# EAGLE board AVRI2CIO_V0_2_LEVEL0 (EAGLE 6.5.0)
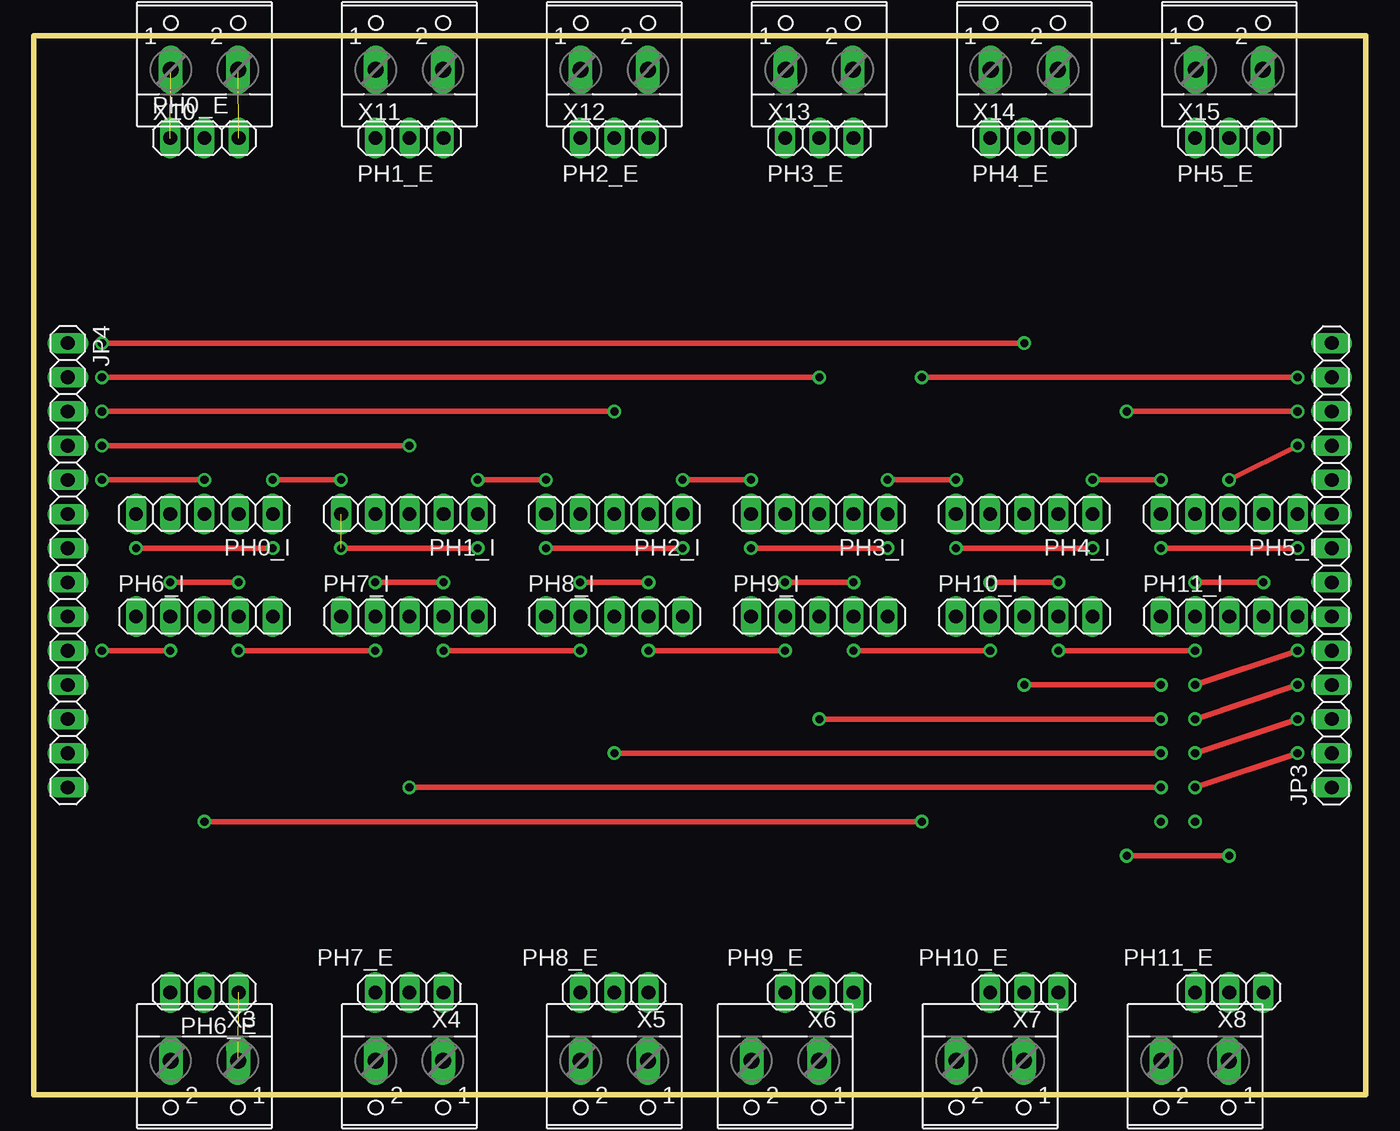
[diagram p0: board, top side]
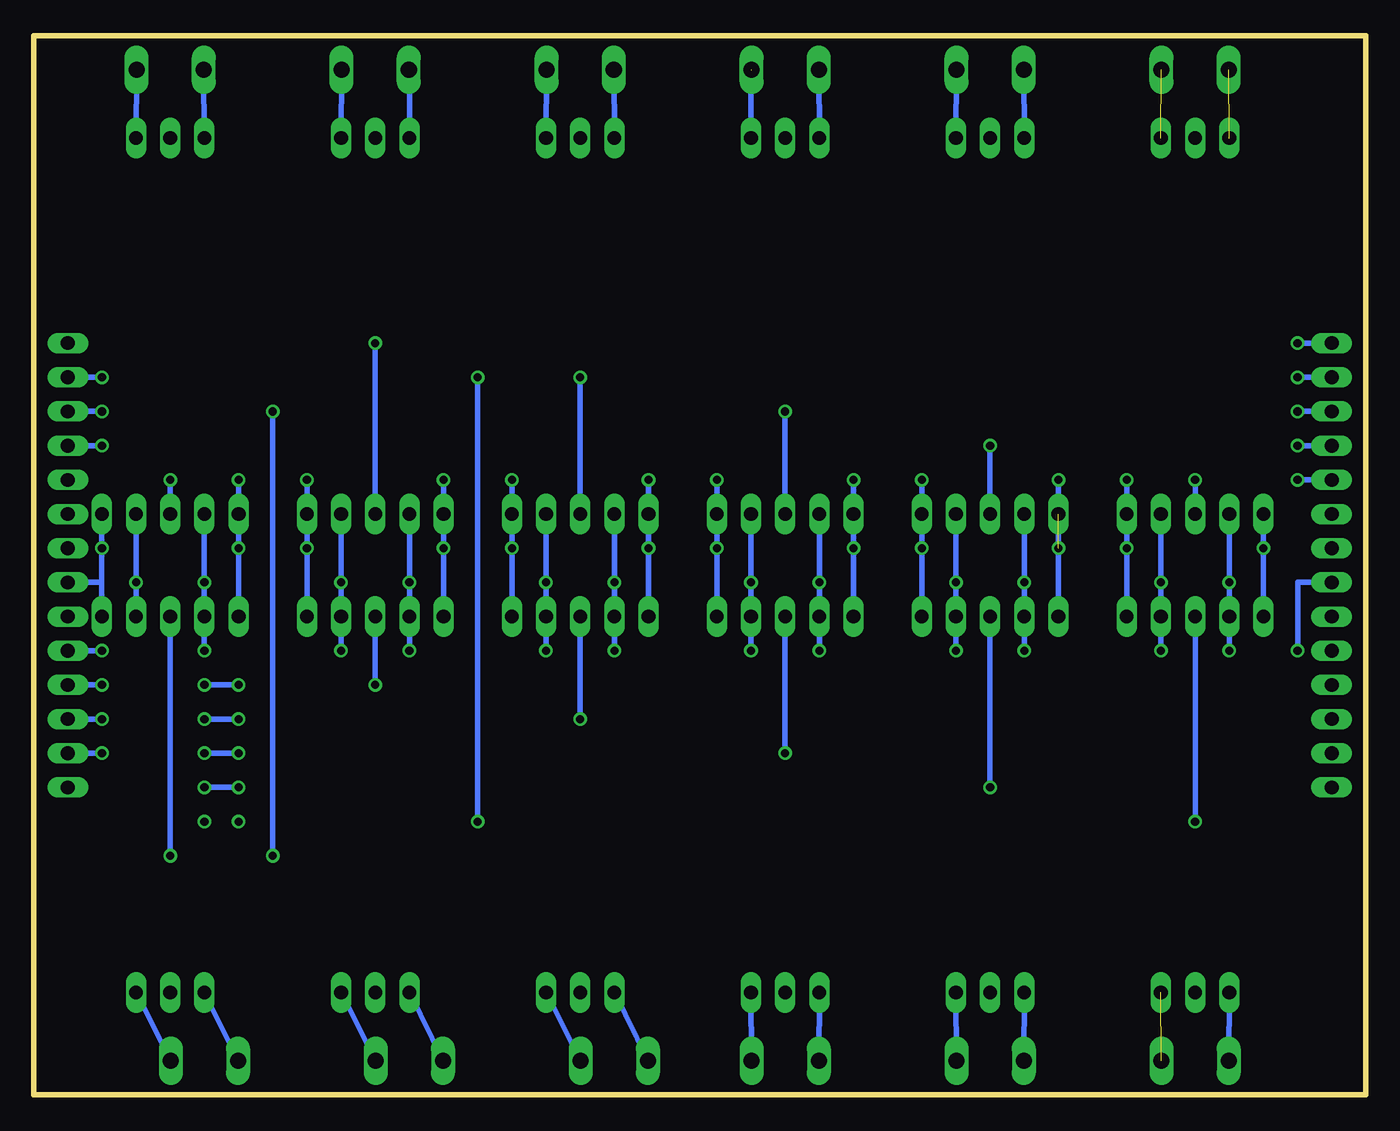
[diagram p1: board, bottom side, seen from below]

Size 99.06 x 78.74 mm. Coordinates in mm from the lower left corner, seen from the top.
Outline: 0,0 99.06,0 99.06,78.74 0,78.74 0,0
Copper layers (1*16): Top 0.035mm / dielectric 1.5mm / Bottom 0.035mm
Design rules "default": minimum track width 10mil, minimum drill 24mil, track to track 8mil, track to pad 8mil, pad to pad 8mil, via to via 8mil, smd to smd 8mil, copper to edge 40mil, drill to drill 8mil, minimum pad ring 10mil, minimum via ring 8mil, stop-mask expansion 4mil, vias tented up to drill 0mil, thermal gap 10mil

## Footprints (pad centres in the part's own frame; a part is rotated, then mirrored left to right if it is on the bottom)
1X14 = drill 1.016 long: 1 -16.51,0; 2 -13.97,0; 3 -11.43,0; 4 -8.89,0; 5 -6.35,0; 6 -3.81,0; 7 -1.27,0; 8 1.27,0; 9 3.81,0; 10 6.35,0; 11 8.89,0; 12 11.43,0; 13 13.97,0; 14 16.51,0
1X03 = drill 1.016 long: 1 -2.54,0; 2 0,0; 3 2.54,0
1X05 = drill 1.016 long: 1 -5.08,0; 2 -2.54,0; 3 0,0; 4 2.54,0; 5 5.08,0
W237-102 = drill 1.194 long: 1 -2.5,-1.27; 2 2.5,-1.27

## Placement (x,y rotation side)
JP3  [1X14]  96.52,39.37 90 top
JP4  [1X14]  2.54,39.37 270 top
PH0_E  [1X03]  12.7,71.12 0 top
PH0_I  [1X05]  12.7,43.18 180 top
PH1_E  [1X03]  27.94,71.12 0 top
PH1_I  [1X05]  27.94,43.18 180 top
PH2_E  [1X03]  43.18,71.12 0 top
PH2_I  [1X05]  43.18,43.18 180 top
PH3_E  [1X03]  58.42,71.12 0 top
PH3_I  [1X05]  58.42,43.18 180 top
PH4_E  [1X03]  73.66,71.12 0 top
PH4_I  [1X05]  73.66,43.18 180 top
PH5_E  [1X03]  88.9,71.12 0 top
PH5_I  [1X05]  88.9,43.18 180 top
PH6_E  [1X03]  12.7,7.62 180 top
PH6_I  [1X05]  12.7,35.56 0 top
PH7_E  [1X03]  27.94,7.62 180 top
PH7_I  [1X05]  27.94,35.56 0 top
PH8_E  [1X03]  43.18,7.62 180 top
PH8_I  [1X05]  43.18,35.56 0 top
PH9_E  [1X03]  58.42,7.62 180 top
PH9_I  [1X05]  58.42,35.56 0 top
PH10_E  [1X03]  73.66,7.62 180 top
PH10_I  [1X05]  73.66,35.56 0 top
PH11_E  [1X03]  88.9,7.62 180 top
PH11_I  [1X05]  88.9,35.56 0 top
X3  [W237-102]  12.7,1.27 180 top
X4  [W237-102]  27.94,1.27 180 top
X5  [W237-102]  43.18,1.27 180 top
X6  [W237-102]  55.88,1.27 180 top
X7  [W237-102]  71.12,1.27 180 top
X8  [W237-102]  86.36,1.27 180 top
X10  [W237-102]  12.7,77.47 0 top
X11  [W237-102]  27.94,77.47 0 top
X12  [W237-102]  43.18,77.47 0 top
X13  [W237-102]  58.42,77.47 0 top
X14  [W237-102]  73.66,77.47 0 top
X15  [W237-102]  88.9,77.47 0 top

## Library data of the parts
JP3 JP4 PH0_E PH0_I PH1_E PH1_I PH2_E PH2_I PH3_E PH3_I PH4_E PH4_I PH5_E PH5_I PH6_E PH6_I PH7_E PH7_I PH8_E PH8_I PH9_E PH9_I PH10_E PH10_I PH11_E PH11_I = pinhead
X3-X8 X10-X15 = con-wago-500; MPN: 237-102; OC_FARNELL: unknown; OC_NEWARK: 70K9898

## Nets
+5V: JP3.7 PH0_I.1 PH0_I.5 PH1_I.1 PH1_I.5 PH2_I.1 PH2_I.5 PH3_I.1 PH3_I.5 PH4_I.1 PH4_I.5 PH5_I.1 PH5_I.5 PH6_I.1 PH6_I.5 PH7_I.1 PH7_I.5 PH8_I.1 PH8_I.5 PH9_I.1 PH9_I.5 PH10_I.1 PH10_I.5 PH11_I.1 PH11_I.5
GND: JP4.8 PH0_I.2 PH0_I.4 PH1_I.2 PH1_I.4 PH2_I.2 PH2_I.4 PH3_I.2 PH3_I.4 PH4_I.2 PH4_I.4 PH5_I.2 PH5_I.4 PH6_I.2 PH6_I.4 PH7_I.2 PH7_I.4 PH8_I.2 PH8_I.4 PH9_I.2 PH9_I.4 PH10_I.2 PH10_I.4 PH11_I.2 PH11_I.4
N$1: PH0_E.3 X10.2
N$2: PH0_E.1 X10.1
N$3: PH6_E.3 X3.2
N$4: PH6_E.1 X3.1
N$5: PH7_E.3 X4.2
N$6: PH7_E.1 X4.1
N$7: PH8_E.3 X5.2
N$8: PH8_E.1 X5.1
N$9: PH9_E.3 X6.2
N$10: PH9_E.1 X6.1
N$11: PH10_E.3 X7.2
N$12: PH10_E.1 X7.1
N$13: PH11_E.3 X8.2
N$14: PH11_E.1 X8.1
N$16: JP4.2 PH3_I.3
N$17: JP3.11 PH5_I.3
N$18: JP3.3 PH8_I.3
N$19: PH1_E.1 X11.1
N$20: PH1_E.3 X11.2
N$21: JP3.2 PH7_I.3
N$22: JP3.13 PH6_I.3
N$23: PH2_E.1 X12.1
N$24: PH2_E.3 X12.2
N$25: PH3_E.1 X13.1
N$26: PH3_E.3 X13.2
N$27: PH4_E.1 X14.1
N$28: PH4_E.3 X14.2
N$29: PH5_E.1 X15.1
N$30: PH5_E.3 X15.2
N$31: JP3.12 PH11_I.3
N$32: JP4.3 PH2_I.3
N$34: JP4.4 PH1_I.3
N$35: JP4.5 PH0_I.3
N$36: JP4.1 PH4_I.3
N$37: JP4.11
PD3: JP3.4 PH9_I.3
PD5: JP3.5 PH10_I.3

## Tracks (layer width: path | path; a pad name or v marks a point on that pad's centre or on a via)
+5V  (via drill 0.6)  (1 unrouted)
  Top 0.406: v7.62,40.64 v17.78,40.64 | v22.86,40.64 v33.02,40.64 | v38.1,40.64 v48.26,40.64 | v53.34,40.64 v63.5,40.64 | v68.58,40.64 v78.74,40.64 | v83.82,40.64 v93.98,40.64 | v22.86,45.72 v17.78,45.72 | v33.02,45.72 v38.1,45.72 | v48.26,45.72 v53.34,45.72 | v63.5,45.72 v68.58,45.72 | v83.82,45.72 v78.74,45.72
  Bottom 0.406: PH2_I.1 v48.26,40.64 PH8_I.5 v48.26,45.72 | PH3_I.1 v63.5,40.64 PH9_I.5 v63.5,45.72 | PH4_I.1 v78.74,40.64 PH10_I.5 v78.74,45.72 | PH5_I.1 v93.98,40.64 93.98,38.1 | PH1_I.1 v33.02,40.64 PH7_I.5 v33.02,45.72 | PH0_I.5 v7.62,40.64 PH6_I.1 | PH6_I.5 v17.78,40.64 PH0_I.1 v17.78,45.72 | PH7_I.1 v22.86,40.64 v22.86,45.72 | PH8_I.1 v38.1,40.64 PH2_I.5 v38.1,45.72 | PH9_I.1 v53.34,40.64 PH3_I.5 v53.34,45.72 | PH10_I.1 v68.58,40.64 PH4_I.5 v68.58,45.72 | PH11_I.1 v83.82,40.64 PH5_I.5 v83.82,45.72 | PH11_I.5 93.98,38.1 | JP3.7 93.98,38.1
GND  (via drill 0.6)
  Top 0.406: v91.44,38.1 v86.36,38.1 | v76.2,38.1 v71.12,38.1 | v60.96,38.1 v55.88,38.1 | v45.72,38.1 v40.64,38.1 | v10.16,38.1 v15.24,38.1 | v25.4,38.1 v30.48,38.1 | v15.24,33.02 v25.4,33.02 | v30.48,33.02 v40.64,33.02 | v45.72,33.02 v55.88,33.02 | v60.96,33.02 v71.12,33.02 | v76.2,33.02 v86.36,33.02 | v5.08,33.02 v10.16,33.02
  Bottom 0.406: PH7_I.4 v30.48,38.1 PH1_I.2 v30.48,33.02 | PH8_I.4 v45.72,38.1 PH2_I.2 v45.72,33.02 | PH9_I.4 v60.96,38.1 PH3_I.2 v60.96,33.02 | PH11_I.4 v91.44,38.1 PH5_I.2 | PH10_I.4 v76.2,38.1 PH4_I.2 v76.2,33.02 | PH0_I.4 v10.16,38.1 PH6_I.2 v10.16,33.02 | PH1_I.4 v25.4,38.1 PH7_I.2 v25.4,33.02 | PH2_I.4 v40.64,38.1 PH8_I.2 v40.64,33.02 | PH3_I.4 v55.88,38.1 PH9_I.2 v55.88,33.02 | PH4_I.4 v71.12,38.1 PH10_I.2 v71.12,33.02 | PH5_I.4 v86.36,38.1 PH11_I.2 v86.36,33.02 | PH6_I.4 v15.24,38.1 PH0_I.2 PH6_I.4 | v15.24,33.02 PH6_I.4 | JP4.8 5.08,38.1 v5.08,33.02
N$1  (1 unrouted)
N$2  (1 unrouted)
N$3
  Bottom 0.406: X3.2 PH6_E.3
N$4  (1 unrouted)
N$5
  Bottom 0.406: X4.2 PH7_E.3
N$6
  Bottom 0.406: X4.1 PH7_E.1
N$7
  Bottom 0.406: X5.2 PH8_E.3
N$8
  Bottom 0.406: X5.1 PH8_E.1
N$9
  Bottom 0.406: X6.2 PH9_E.3
N$10
  Bottom 0.406: X6.1 PH9_E.1
N$11
  Bottom 0.406: X7.2 PH10_E.3
N$12
  Bottom 0.406: X7.1 PH10_E.1
N$13
  Bottom 0.406: X8.2 PH11_E.3
N$14
  Bottom 0.406: X8.1 PH11_E.1
N$16  (via drill 0.6)
  Top 0.406: v5.08,53.34 v58.42,53.34
  Bottom 0.406: JP4.2 v5.08,53.34 | PH3_I.3 v58.42,53.34
N$17  (via drill 0.6)
  Top 0.406: v93.98,48.26 v88.9,45.72
  Bottom 0.406: PH5_I.3 v88.9,45.72 | v93.98,48.26 JP3.11
N$18  (via drill 0.6)
  Top 0.406: v93.98,27.94 v86.36,25.4 | v43.18,25.4 83.82,25.4
  Bottom 0.406: JP3.3 v93.98,27.94 | PH8_I.3 v43.18,25.4 | v86.36,25.4 83.82,25.4
N$19
  Bottom 0.406: PH1_E.1 X11.1
N$20
  Bottom 0.406: PH1_E.3 X11.2
N$21  (via drill 0.6)
  Top 0.406: v93.98,25.4 v86.36,22.86 | v83.82,22.86 v27.94,22.86
  Bottom 0.406: JP3.2 v93.98,25.4 | v86.36,22.86 v83.82,22.86 | v27.94,22.86 PH7_I.3
N$22  (via drill 0.6)  (1 unrouted)
  Top 0.406: v12.7,20.32 v66.04,20.32 | v66.04,53.34 93.98,53.34
  Bottom 0.406: JP3.13 93.98,53.34 | PH6_I.3 v12.7,20.32 | v66.04,20.32 v66.04,53.34
N$23
  Bottom 0.406: PH2_E.1 X12.1
N$24  (1 unrouted)
  Bottom 0.406: PH2_E.3 45.72,76.2
N$25
  Bottom 0.406: PH3_E.1 X13.1
N$26
  Bottom 0.406: PH3_E.3 X13.2
N$27
  Bottom 0.406: PH4_E.1 71.12,76.2 X14.1
N$28
  Bottom 0.406: PH4_E.3 X14.2
N$29
  Bottom 0.406: PH5_E.1 X15.1
N$30
  Bottom 0.406: PH5_E.3 X15.2
N$31  (via drill 0.6)
  Top 0.406: v93.98,50.8 v81.28,50.8 | v81.28,17.78 v88.9,17.78
  Bottom 0.406: JP3.12 v93.98,50.8 | PH11_I.3 v88.9,17.78 | v81.28,50.8 v81.28,17.78
N$32  (via drill 0.6)
  Top 0.406: v43.18,50.8 v5.08,50.8
  Bottom 0.406: JP4.3 v5.08,50.8 | PH2_I.3 v43.18,50.8
N$34  (via drill 0.6)
  Top 0.406: v5.08,48.26 v27.94,48.26
  Bottom 0.406: JP4.4 v5.08,48.26 | PH1_I.3 v27.94,48.26
N$35  (via drill 0.6)
  Top 0.406: v5.08,45.72 v12.7,45.72
  Bottom 0.406: JP4.5 v5.08,45.72 | PH0_I.3 v12.7,45.72
N$36  (via drill 0.6)
  Top 0.406: v73.66,55.88 v5.08,55.88
  Bottom 0.406: JP4.1 v5.08,55.88 | PH4_I.3 v73.66,55.88
N$38  (via drill 0.6)
  other vias: 83.82,30.48
N$51  (via drill 0.6)
  other vias: 83.82,27.94
N$52  (via drill 0.6)
  other vias: 86.36,25.4
N$53  (via drill 0.6)
  other vias: 83.82,25.4
N$54  (via drill 0.6)
  other vias: 86.36,22.86
N$55  (via drill 0.6)
  other vias: 83.82,22.86
N$56  (via drill 0.6)
  other vias: 86.36,20.32
N$57  (via drill 0.6)
  other vias: 83.82,20.32
N$58  (via drill 0.6)
  other vias: 43.18,25.4
N$59  (via drill 0.6)
  other vias: 27.94,22.86
N$60  (via drill 0.6)
  other vias: 12.7,20.32
N$61  (via drill 0.6)
  other vias: 93.98,25.4
N$62  (via drill 0.6)
  other vias: 93.98,53.34
N$63  (via drill 0.6)
  other vias: 66.04,53.34
N$64  (via drill 0.6)
  other vias: 66.04,20.32
PD3  (via drill 0.6)
  Top 0.406: v93.98,30.48 v86.36,27.94 | v83.82,27.94 v58.42,27.94
  Bottom 0.406: JP3.4 v93.98,30.48 | PH9_I.3 v58.42,27.94 | v86.36,27.94 v83.82,27.94
PD5  (via drill 0.6)
  Top 0.406: v93.98,33.02 v86.36,30.48 | v83.82,30.48 v73.66,30.48
  Bottom 0.406: JP3.5 v93.98,33.02 | PH10_I.3 v73.66,30.48 | v86.36,30.48 v83.82,30.48